# Altium PCB S6_Fuel_counter_h.PcbDoc
Units mm, origin at the board's own origin, x right, y up, seen from the top; angles counter-clockwise.
Board outline 87.83 x 73.75 mm, 2 copper layers (Top Layer, Bottom Layer); 82 components, 47 nets, 252 pads, 148 vias.
Unrouted connection lines stored in the file: 3.
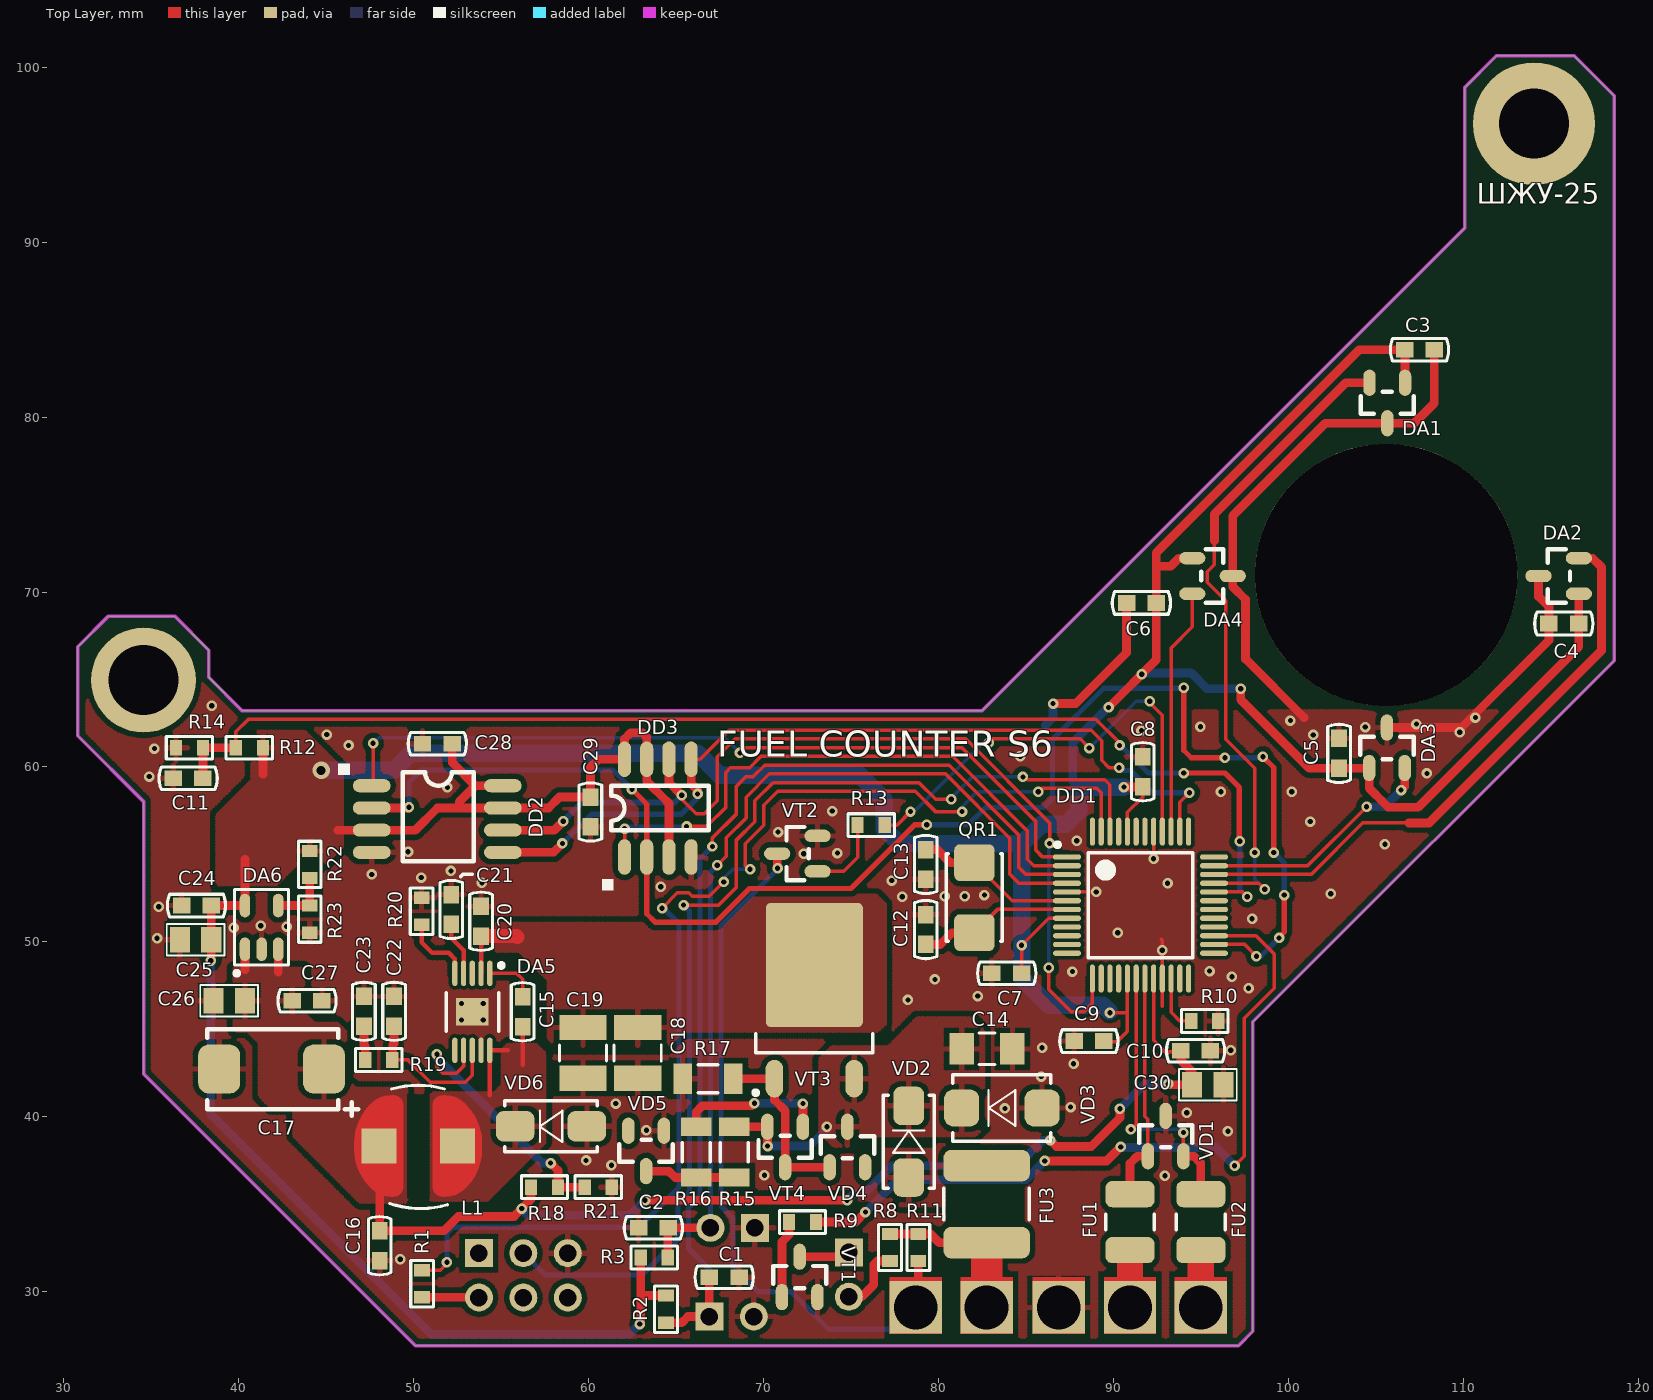
[diagram p0: Top Layer view]
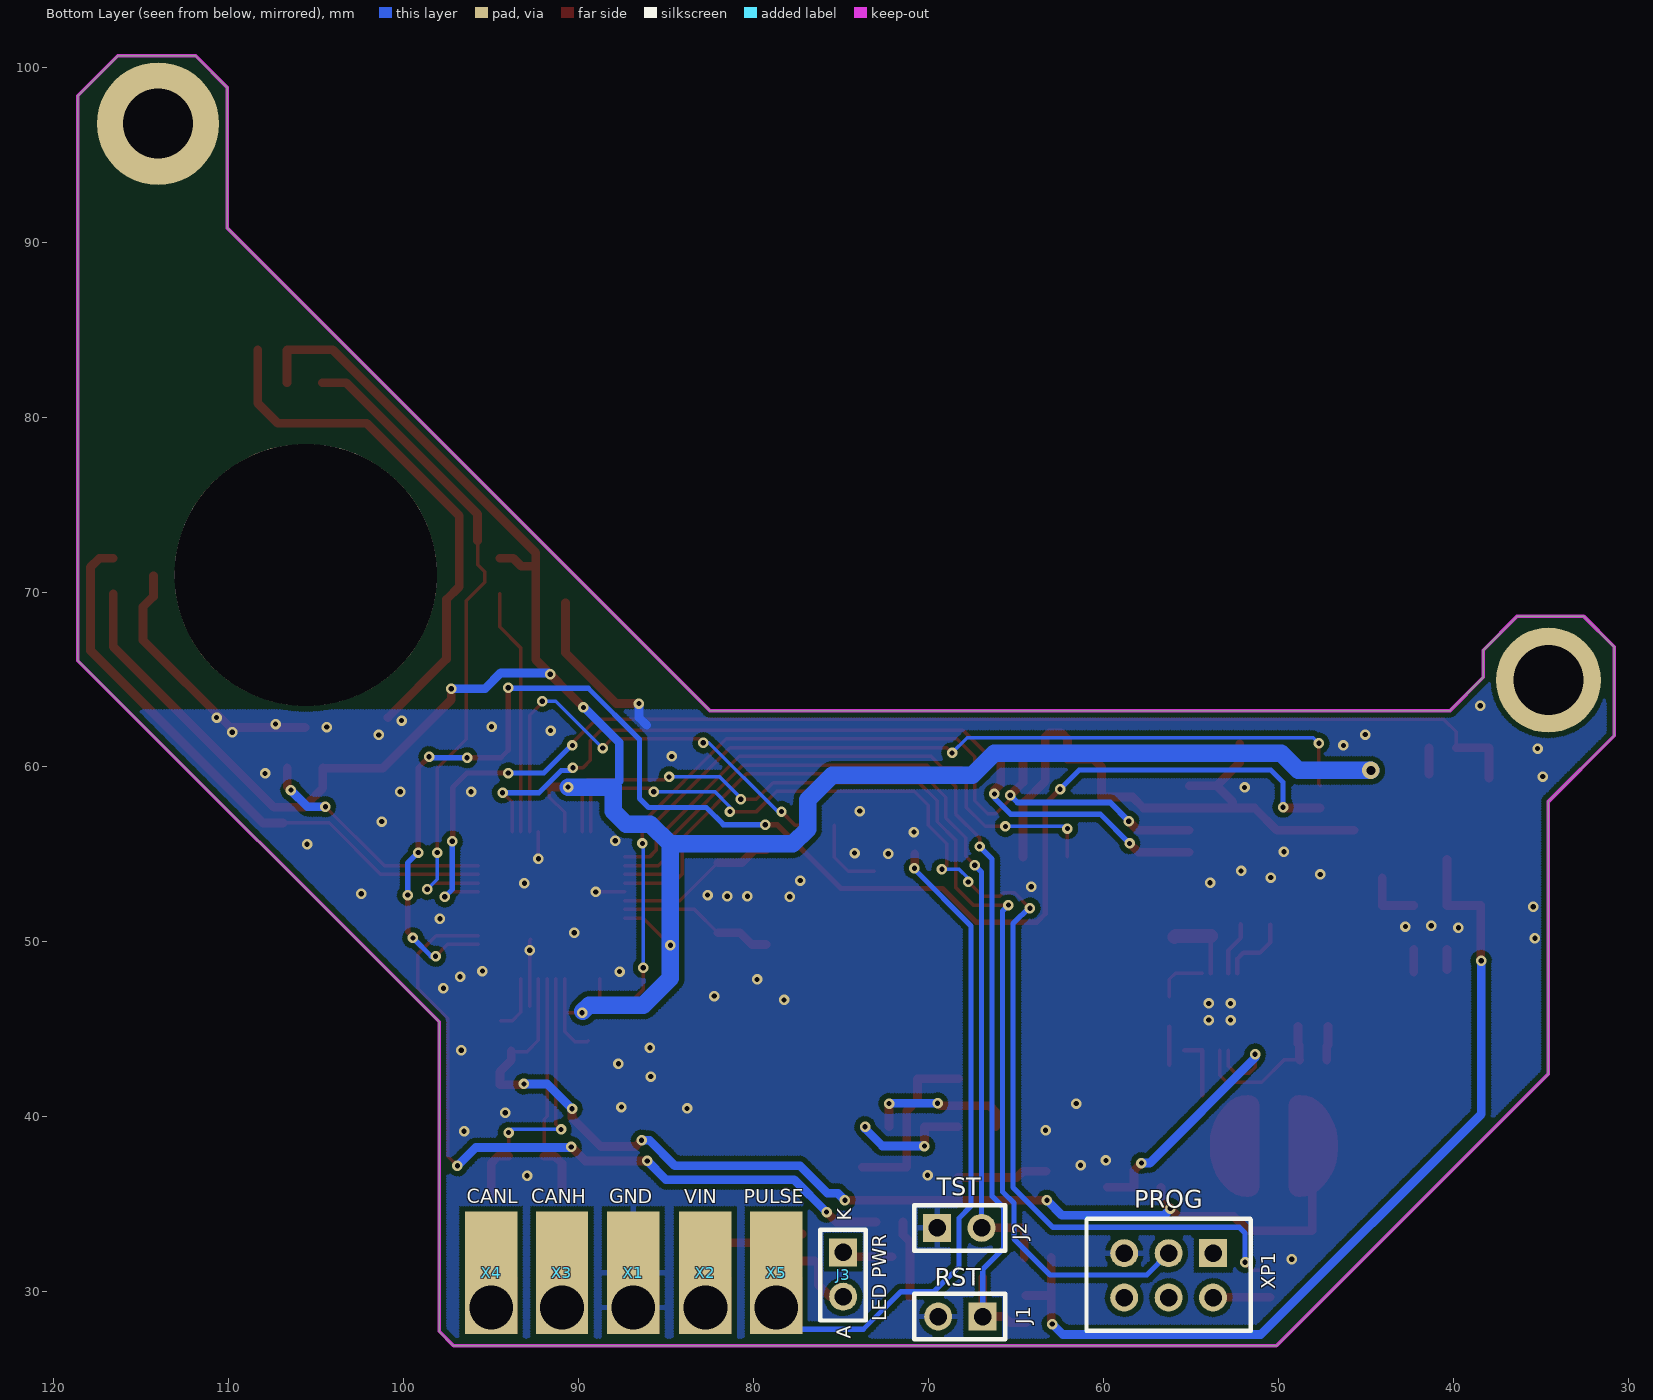
[diagram p1: Bottom Layer view, seen from below]

## Layer stack, top to bottom
Top Solder: solder mask 0.0102, Solder Resist, Dk 3.5
Top Layer: signal copper 0.0356
Dielectric 1: dielectric 0.32, FR-4, Dk 4.8
Bottom Layer: signal copper 0.0356
Bottom Solder: solder mask 0.0102, Solder Resist, Dk 3.5

## Board outline
34.55,42.45 34.55,58.025 30.8,61.775 30.8,66.875 32.55,68.625 36.325,68.625 38.275,66.675 38.275,65.125 40.175,63.225 82.5,63.225 110.075,90.8 110.075,98.825 111.899,100.649 116.351,100.649 118.625,98.375 118.625,66.075 97.975,45.425 97.975,27.725 97.15,26.9 50.1,26.9

## Design rules (kind name [scope] priority, off if disabled: settings)
Clearance Clearance_1 [InComponent('DD1') OR InComponent('DA5')] p1: gap=0.2 ignorepadtopadclearanceinfootprint=FALSE except(0: Arc-Hole Track-Hole SMDPad-Hole THPad-Hole Via-Hole Fill-Hole Poly-Hole Region-Hole Text-Hole)
Clearance [All] p2: gap=0.3 ignorepadtopadclearanceinfootprint=FALSE except(0: Arc-Hole Track-Hole SMDPad-Hole THPad-Hole Via-Hole Fill-Hole Poly-Hole Region-Hole Text-Hole)
ComponentClearance [All] p1: gap=0.2 collisioncheckmode=3 verticalgap=2540 showdistances=FALSE
PolygonConnect PolygonConnect_1 [IsVia OR InComponent('VT3') AND InNet('VIN_F') OR InComponent('L1') OR InComponent('DA5') AND InNet('GND')] p1: connectstyle=Direct reliefconductorwidth=0.254 reliefentries=4 polygonreliefangle="90 Angle" airgapwidth=0.254
PolygonConnect [All] p2: connectstyle=Relief reliefconductorwidth=0.3 reliefentries=4 polygonreliefangle="90 Angle" airgapwidth=0.3
RoutingVias [All] p1: holewidth=0.4 width=0.8 viastyle="Through Hole" minholewidth=0.3 minwidth=0.6 maxholewidth=0.5 maxwidth=1
SolderMaskExpansion [All] p1: expansion=0.102
Width [All] p1: maxlimit=3 minlimit=0.2 preferedwidth=0.5
29 further rules are at their usual default settings.

## Classes and differential pairs
component class Power: C14 C15 C16 C17 C18 C19 C20 C21 C22 C23 C24 C25 C26 C27 DA5 DA6 FU3 L1 R15 R16 R17 R18 R19 R20 R21 R22 R23 VD2 VD3 VD4 VD5 VD6 VT3 VT4
component class MCU: C7 C8 C9 C11 C12 C13 C28 C29 C30 DD1 DD2 DD3 J3 QR1 R8 R9 R10 R11 R12 R13 R14 VT1 VT2
component class Hall_sensor: C3 C4 C5 C6 DA1 DA2 DA3 DA4
component class Connections: C1 C2 FU1 FU2 J1 J2 R1 R2 R3 VD1 X1 X2 X3 X4 X5 XP1

## Components (designator, comment, footprint, x,y, rotation, side; value= is the part's Value field where it differs from the comment)
C1 "200pF" CC0603 67.75,30.825 r180 top
C2 "200pF" CC0603 63.7,33.65 r0 top
C3 "0.1uF" CC0603 107.5,83.85 r180 top
C4 "0.1uF" CC0603 115.75,68.2 r0 top
C5 "0.1uF" CC0603 102.9,60.775 r270 top
C6 "0.1uF" CC0603 91.6,69.375 r0 top
C7 "0.1uF" CC0603 83.9,48.2 r0 top
C8 "0.1uF" CC0603 91.675,59.725 r270 top
C9 "0.1uF" CC0603 88.6,44.325 r180 top
C10 "0.1uF" CC0603 94.7,43.775 r180 top
C11 "0.1uF" CC0603 37.1,59.35 r0 top
C12 "22pF" CC0603 79.273,50.7 r270 top
C13 "22pF" CC0603 79.275,54.425 r90 top
C14 "0.1uF" CC1206 82.775,43.875 r180 top
C15 "0.1 uF" CC0603 56.225,46 r90 top
C16 "0.1 uF" CC0603 48.05,32.625 r270 top
C17 "470uFx6.3V" TAJ-D-1M 41.875,42.725 r180 top
C18 "10uFx50V" CC1210 62.8,43.65 r90 top
C19 "10uFx50V" CC1210 59.675,43.65 r90 top
C20 "0.1 uF" CC0603 53.85,51.175 r90 top
C21 "10 nF" CC0603 52.15,51.85 r90 top
C22 "330pF" CC0603 48.875,46.025 r90 top
C23 "560pF" CC0603 47.15,46.025 r90 top
C24 "0.1uF" CC0603 37.575,52.075 r180 top
C25 "10uFx6.3V" CC0805 37.525,50.125 r0 top
C26 "4.7uF 6.3V" CC0805 39.45,46.625 r0 top
C27 "0.1uF" CC0603 43.9,46.625 r0 top
C28 "n.p" CC0603 51.35,61.325 r180 top
C29 "0.1uF" CC0603 60.1,57.425 r270 top
C30 "10uFx16V" CC0805 95.4,41.825 r180 top
DA1 "DRV5033AJQDBZR" SOT-23(123) 106.675,81.975 r90 top
DA2 "DRV5033AJQDBZR" SOT-23(123) 116.625,69.9 r0 top
DA3 "DRV5033AJQDBZR" SOT-23(123) 104.625,59.925 r270 top
DA4 "DRV5033AJQDBZR" SOT-23(123) 94.5,71.932 r180 top
DA5 "TPS54260DGQ" S-PDSO-G10 54.35,48.2 r270 top
DA6 "AP2210K-ADJTRG1" SOT23-5 41.3,50.825 r90 top
DD1 "LPC11C24FBD48" LQFP-48 91.55,52.1 r0 top
DD2 "n.p" EIAJ_SO8 47.6,58.925 r0 top
DD3 "FM25CL64-G" SO-8 62.05,54.85 r0 top
FU1 "MICROSMD010F-2" RC1210 90.95,33.975 r270 top
FU2 "MICROSMD010F-2" RC1210 95,33.975 r270 top
FU3 "MF-SMDF050" MF-SMDF 82.75,35 r90 top
J1 "PLS-02" PLS-02 66.9,28.575 r0 bottom
J2 "PLS-02" PLS-02 69.5,33.65 r180 bottom
J3 "PLS-02" PLS-02 74.875,32.25 r270 bottom
L1 "330uH" SDR0603 52.5,38.325 r180 top
QR1 "NX5032GA-12.000MHz LN-CD-1" AC5032_2 82.05,52.525 r270 top
R1 "100E" RC0603 50.475,30.45 r90 top
R2 "10k" RC0603 64.425,29 r90 top
R3 "10k" RC0603 63.75,31.95 r180 top
R8 "3k" RC0603 77.225,32.525 r90 top
R9 "1k" RC0603 72.225,33.975 r180 top
R10 "0E" RC0603 95.225,45.475 r180 top
R11 "10k" RC0603 78.85,32.525 r90 top
R12 "10k" RC0603 40.6,61.1 r0 top
R13 "1k" RC0603 76.15,56.675 r180 top
R14 "NCP18XH103J03RB" RC0603 37.175,61.1 r0 top
R15 "220k" RC1206 68.325,37.975 r90 top
R16 "220k" RC1206 66.15,37.975 r90 top
R17 "220k" RC1206 66.825,42.175 r180 top
R18 "68k1 1%" RC0603 57.475,35.975 r180 top
R19 "12k" RC0603 47.997,43.245 r0 top
R20 "240k" RC0603 50.45,51.75 r270 top
R21 "13k 1%" RC0603 60.55,35.975 r180 top
R22 "11k 1%" RC0603 44.05,54.425 r90 top
R23 "18k 1%" RC0603 44.05,51.3 r90 top
VD1 "PESD2CAN" SOT-23(123) 91.975,37.725 r270 top
VD2 "GS1M" SMA 78.3,38.575 r90 top
VD3 "SMBJ150A" SMB 83.625,40.5 r0 top
VD4 "BZX84C15" SOT-23(123) 73.775,37.1 r270 top
VD5 "BZX84C39" SOT-23(123) 64.3,39.213 r90 top
VD6 "SK34SMA" SMA 57.85,39.45 r180 top
VT1 "BC817-40" SOT-23(123) 71.05,29.675 r270 top
VT2 "BC817-40" SOT-23(123) 73.1,54.025 r0 top
VT3 "FQD5P20TM" D-PAK(TO-252AA) 72.9,46.675 r90 top
VT4 "BC807-40" SOT-23(123) 72.25,39.437 r90 top
X1 "PIN_7x3mm_SMD" PIN_7x3mm_SMD 86.875,31.075 r90 bottom
X2 "PIN_7x3mm_SMD" PIN_7x3mm_SMD 82.75,31.075 r90 bottom
X3 "PIN_7x3mm_SMD" PIN_7x3mm_SMD 90.95,31.075 r90 bottom
X4 "PIN_7x3mm_SMD" PIN_7x3mm_SMD 95,31.075 r90 bottom
X5 "PIN_7x3mm_SMD" PIN_7x3mm_SMD 78.7,31.075 r90 bottom
XP1 "PLD-06" PIN6 53.725,32.2 r0 bottom

## Footprints (in the part's own frame and the unit in brackets; to place one, negate y for a bottom-side part, rotate by r counter-clockwise, add the part's x,y. Pads: shape width x height; smd on the part's side, far side on the other; paste and mask are expansions set on the pad)
AC5032_2 [mm]
  rrect30% 2.1x2.3 smd mask+0.05: 1(-2,0) 2(2,0)
  silkscreen extent -2.5,-1.6 2.5,1.6
CC0603 [mm]
  rect 1x0.9 smd paste-25.4 mask+0.05: 1(-0.85,0) 2(0.85,0)
  silkscreen extent -1.66,-0.65 1.66,0.65
CC0805 [mm]
  rect 1.15x1.45 smd paste-25.4 mask+0.05: 1(-0.9,0) 2(0.9,0)
  silkscreen extent -1.65,-0.9 1.65,0.9
CC1206 [mm]
  rect 1.4x1.8 smd paste-25.4 mask+0.05: 1(-1.45,0) 2(1.45,0)
  silkscreen extent -0.45,-0.9 0.45,0.9
CC1210 [mm]
  rect 1.45x2.7 smd paste-10 mask+0.05: 1(-1.45,0) 2(1.45,0)
  silkscreen extent -0.45,-1.35 0.45,1.35
D-PAK(TO-252AA) [mm]
  oval 2.15x1 smd mask+0.05: 1(-4.5,2.28) 3(-4.5,-2.28)
  rrect10% 7.1x5.55 smd mask+0.05: 2(2,0)
  silkscreen extent -5.42,-3.35 -1.92,3.47
EIAJ_SO8 [mil]
  oval 85x29.53 smd mask+1.97: 1(0,0) 2(0,-50) 3(0,-100) 4(0,-150) 5(295,-150) 6(295,-100) 7(295,-50) 8(295,0)
  silkscreen extent -75,-170 230,50
LQFP-48 [mm]
  oval 1.6x0.3 smd mask+0.05: 1(-4.2,2.75) 2(-4.2,2.25) 3(-4.2,1.75) 4(-4.2,1.25) 5(-4.2,0.75) 6(-4.2,0.25) 7(-4.2,-0.25) 8(-4.2,-0.75) 9(-4.2,-1.25) 10(-4.2,-1.75) 11(-4.2,-2.25) 12(-4.2,-2.75) 25(4.2,-2.75) 26(4.2,-2.25) 27(4.2,-1.75) 28(4.2,-1.25) 29(4.2,-0.75) 30(4.2,-0.25) 31(4.2,0.25) 32(4.2,0.75) 33(4.2,1.25) 34(4.2,1.75) 35(4.2,2.25) 36(4.2,2.75)
  oval 0.3x1.6 smd mask+0.05: 13(-2.75,-4.2) 14(-2.25,-4.2) 15(-1.75,-4.2) 16(-1.25,-4.2) 17(-0.75,-4.2) 18(-0.25,-4.2) 19(0.25,-4.2) 20(0.75,-4.2) 21(1.25,-4.2) 22(1.75,-4.2) 23(2.25,-4.2) 24(2.75,-4.2) 37(2.75,4.2) 38(2.25,4.2) 39(1.75,4.2) 40(1.25,4.2) 41(0.75,4.2) 42(0.25,4.2) 43(-0.25,4.2) 44(-0.75,4.2) 45(-1.25,4.2) 46(-1.75,4.2) 47(-2.25,4.2) 48(-2.75,4.2)
  silkscreen extent -4.87,-3 3,3.57
MF-SMDF [mm]
  rrect50% 1.8x4.95 smd mask+0.05: 1(-2.2,0) 2(2.2,0)
  silkscreen extent -0.9,-2.45 0.9,2.45
PIN6 [mm]
  rect 1.6x1.6 hole 1 mask+0.05: 1(0,0)
  round 1.6 hole 1 mask+0.05: 2(0,2.54) 3(2.54,0) 4(2.54,2.54) 5(5.08,0) 6(5.08,2.54)
  silkscreen extent -2.16,-1.96 7.24,4.44
PIN_7x3mm_SMD [mm]
  rect 7x3 smd mask+0.05: 1(0,0)
PLS-02 [mm]
  rect 1.6x1.6 hole 1 mask+0.05: 1(0,0)
  round 1.6 hole 1 mask+0.05: 2(2.54,0)
  silkscreen extent -1.3,-1.3 3.9,1.3
RC0603 [mm]
  rect 0.7x0.9 smd paste-25.4 mask+0.05: 1(-0.775,0) 2(0.774,0)
  silkscreen extent -1.32,-0.65 1.33,0.65
RC1206 [mm]
  rect 1.05x1.75 smd paste-25.4 mask+0.05: 1(-1.45,0) 2(1.45,0)
  silkscreen extent -0.55,-0.8 0.55,0.8
RC1210 [mm]
  rrect50% 1.5x2.8 smd mask+0.05: 1(-1.6,0) 2(1.6,0)
  silkscreen extent -0.45,-1.4 0.45,1.4
S-PDSO-G10 [mm]
  oval 1.45x0.3 smd mask+0.05: 1(0,0) 2(0,-0.5) 3(0,-1) 4(0,-1.5) 5(0,-2) 6(4.4,-2) 7(4.4,-1.5) 8(4.4,-1) 9(4.4,-0.5) 10(4.4,0)
  rect 1.55x1.85 smd mask+0.05: 11(2.2,-1)
  silkscreen extent -0.57,-2.5 3.3,0.77
SDR0603 [mm]
  rect 2x2 smd paste-25.4 mask+0.05: 1(0,0) 2(4.5,0)
  Top Layer region: 3.65,2.9 3.48,2.873 3.327,2.795 3.205,2.673 3.127,2.52 3.1,2.35 3.1,-2.35 3.127,-2.52 3.205,-2.673 3.327,-2.795 3.48,-2.873 3.65,-2.9 3.824,-2.9 4.119,-2.871 4.402,-2.785 4.663,-2.645 4.892,-2.458 5.002,-2.348 5.275,-2.035 5.502,-1.687 5.68,-1.312 5.681,-1.31 5.802,-0.934 5.875,-0.545 5.9,-0.15 5.9,0.183 5.877,0.556 5.807,0.924 5.693,1.28 5.689,1.288 5.505,1.679 5.268,2.04 4.984,2.366 4.908,2.442 4.671,2.637 4.401,2.781 4.107,2.87 3.802,2.9
  Top Layer region: 0.85,-2.9 1.02,-2.873 1.173,-2.795 1.295,-2.673 1.373,-2.52 1.4,-2.35 1.4,2.35 1.373,2.52 1.295,2.673 1.173,2.795 1.02,2.873 0.85,2.9 0.676,2.9 0.381,2.871 0.098,2.785 -0.163,2.645 -0.392,2.458 -0.502,2.348 -0.775,2.035 -1.002,1.687 -1.18,1.312 -1.181,1.31 -1.302,0.934 -1.375,0.545 -1.4,0.15 -1.4,-0.183 -1.377,-0.556 -1.307,-0.924 -1.193,-1.28 -1.189,-1.288 -1.005,-1.679 -0.768,-2.04 -0.484,-2.366 -0.408,-2.442 -0.171,-2.637 0.099,-2.781 0.393,-2.87 0.698,-2.9
  silkscreen extent 0.58,-3.47 3.88,3.57
SMA [mm]
  rrect50% 2.2x1.75 smd mask+0.05: 1(-2.05,0) 2(2.05,0)
  silkscreen extent -2.65,-1.45 2.65,1.45
SMB [mm]
  rrect50% 2x2.1 smd mask+0.05: 1(2.3,0) 2(-2.3,0)
  silkscreen extent -2.8,-1.9 2.8,1.9
SO-8 [mil]
  oval 29.53x80 smd mask+1.97: 1(0,0) 2(50,0) 3(100,0) 4(150,0) 5(150,220) 6(100,220) 7(50,220) 8(0,220)
  silkscreen extent -50,-75 190,160
SOT23-5 [mm]
  oval 1.35x0.6 smd mask+0.05: 1(-1.25,0.95) 2(-1.25,0) 3(-1.25,-0.95) 4(1.25,-0.95) 5(1.25,0.95)
  silkscreen extent -2.74,-1.55 2.16,1.55
SOT-23(123) [mil]
  oval 59.06x28.07 smd mask+1.97: 1(-0.5,0) 2(-0.5,80) 3(-91.5,40)
  silkscreen extent -70,-20 -21,100
TAJ-D-1M [mm]
  rrect50% 2.4x2.8 smd mask+0.05: 1(-2.997,0) 2(2.997,0)
  silkscreen extent -4.95,-2.29 3.68,2.67

## Part data
C1 C2 C3 C4 C5 C6 C7 C8 C9 C10 C11 C12 C13 C15 C16 C20 C21 C22 C23 C24 C27 C28 C29: library part CC0603, "CC0603"
C14: library part CC1206, "CC1206"
C17: library part TAJ-D, "TAJ-D"
C18 C19: library part CC1210, "CC1210"
C25 C26 C30: library part CC0805, "CC0805"
DA1 DA2 DA3 DA4: library part DRV5033, "Hall sensor"
DA6: library part MCP1824T-ADJE/OT, "300 mA, Low Voltage, Low Quiescent Current LDO Regulator, 5-Pin SOT-223, Extended Temperature, Tape and Reel"
DD2: library part S25FL016A0LMFI01, "S25FL016A0LMFI01"
FU1 FU2: library part MICROSMD, "MICROSMD"
FU3: library part MF-SMDF, "MF-SMDF"
L1: library part SDR0603, "SDR0603"
QR1: library part AC5032_2, "AC5032/2"
R1 R2 R3 R8 R9 R10 R11 R12 R13 R14 R18 R19 R20 R21 R22 R23: library part RC0603, "RC0603"
R15 R16 R17: library part RC1206, "RC1206"
VD1: "TVS for CAN"
VD3: library part SMBJ, "SMBJ"
VD4 VD5: library part BZX84, "Zener Voltage Regulator Diode"
VD6: "Schottky Rectifier"
VT1 VT2: library part BC846BLT1, "NPN 500ma transistor"
VT3: library part IRFR9220, "HEXFET Power MOSFET"
VT4: library part BC857B, "BC857B"
XP1: "PLD06"

## Free pads (board coordinates)
  round 6 hole 4 mask+0.05: 0(34.55,64.964)
  round 15 hole 15 unplated mask+0.05: 0(105.6,70.975)
  round 7 hole 4 mask+0.05: 0(114.046,96.774)
  rect 3x3 hole 2.5 mask+0.05: 1(78.7,29.1) 1(82.75,29.1) 1(86.875,29.1) 1(90.95,29.1) 1(95,29.1)

## Via types
v1: diameter 0.6, hole 0.3, Top Layer to Bottom Layer, 147 vias
v2: diameter 1, hole 0.5, Top Layer to Bottom Layer, 1 vias

## Nets (pads, with @x,y where several pads share a name; then routed paths per layer and width w, separated by ;. In a path a pad name is that pad's centre, name@x,y a point inside that pad or via, vN(x,y) a via of type N, cw(c..) or ccw(c..) an arc to the next point about the centre after c; other vN are vias at no path point)
+3V3: C3.2 C4.2 C5.2 C6.2 C7.2 C8.2 C9.1 C24.1 C25.2 C28.1 C29.1 DA1.1 DA2.1 DA3.1 DA4.1 DA6.5 DD1.8 DD1.17 DD1.44 DD2.3 DD2.7 DD2.8 DD3.3 DD3.7 DD3.8 R2.2 R3.2 R12.2 R22.2 | length 242.9
  Top Layer w0.2: C7.2 v1(84.75,49.8) 86.3,51.35 DD1.8 ; C9.1@89.45,44.35 89.5,44.3 90.225,44.3 90.8,44.875 90.8,45.95 ; v1(89.8,45.95) 90.8,45.95 ; DD1.17 90.8,45.95 ; DD1.44 90.8,57.4 91.675,58.275 C8.2
  Top Layer w0.5: v1(38.4,48.925) 38.425,48.95 C25.2 C24.1 DA6.5 40.35,54.725 ; 41.374,59.576 R12.2 ; 45.65,56.385 DD2.3 50.085,56.385 51.355,57.655 52.6,57.655 ; C28.1 52.2,60.25 53.525,58.925 ; DD2.8 53.525,58.925 ; v1(62.925,28.15) 62.976,28.201 62.976,29.825 ; R3.2 62.976,29.825 ; R2.2 63.026,29.774 62.976,29.825 ; DD3.3 64.59,57.908 64.475,58.023 64.475,58.025 63.32,59.18 DD3.7 63.32,61.705 63.075,61.95 62.4,61.95 62.05,61.6 DD3.8 60.563,60.438 60.1,59.975 C29.1 58.325,58.275 57.705,57.655 DD2.7 52.6,57.655 ; v1(89.725,63.4) 92.45,66.125 C6.2 92.45,72.25 104.05,83.85 C3.2 106.675,83.825 DA1.1 ; v1(90.6,58.85) 91.65,58.85 C8.2 ; 92.525,71.475 93.275,71.475 93.732,71.932 DA4.1 ; v1(97.275,64.475) 97.275,63.85 101.2,59.925 C5.2 104.612,59.925 DA3.1 104.625,58.775 104.825,58.575 104.827,58.575 105.325,58.077 105.325,58.075 105.7,57.7 107.425,57.7 116.6,66.875 C4.2 DA2.1@116.6,69.888 ; 52.6,57.655 52.6,58 53.525,58.925
  Bottom Layer w0.5: v1(38.4,48.925) 38.4,40.144 50.994,27.55 62.325,27.55 v1(62.925,28.15) ; 88.019,58.85 87.675,59.194 87.675,61.4 89.675,63.4 v1(89.725,63.4) ; v1(91.625,65.3) 91.7,65.375 94.45,65.375 95.35,64.475 v1(97.275,64.475)
  Bottom Layer w1: v2(44.7,59.8) 48.85,59.8 49.825,60.775 66.25,60.775 67.5,59.525 75.5,59.525 76.9,58.125 76.9,56.45 77.75,55.6 84.769,55.6 ; v1@89.75,46.025 89.4,46.375 86.3,46.375 84.75,47.925 84.75,55.581 84.769,55.6 ; v1(90.6,58.85) 88.019,58.85 88.019,57.469 87.275,56.725 85.894,56.725 84.769,55.6
+5V: C10.2 C16.1 C17.1 C26.2 C27.1 C30.2 DA6.1 DA6.3 DD1.20 L1.2 R18.2 | length 65.4
  Top Layer w0.2: DD1.20 92.3,44.375 92.95,43.725 93.8,43.725 C10.2
  Top Layer w0.5: 40.35,48.4 DA6.1 ; 42.25,48.275 DA6.3 ; 48.05,36.525 C16.1 51.725,33.475 52.55,34.3 55.725,34.3 56.701,35.276 R18.2 ; v1(63.225,35.225) v1(74.775,35.225) ; v1(86.4,38.65) 86.75,38.3 88.725,38.3 90.375,39.95 v1(90.375,40.45) ; v1(93.125,41.875) 93.175,41.825 C30.2 94.5,42.575 93.85,43.225 C10.2
  Bottom Layer w0.5: v1(56.175,34.75) 56.175,34.725 56.525,34.375 62.375,34.375 v1(63.225,35.225) ; v1(74.775,35.225) 75.175,35.625 75.769,35.625 77.344,37.2 84.5,37.2 85.95,38.65 v1(86.4,38.65) ; v1@90.4,40.425 v1(90.375,40.45) 91.8,41.875 v1(93.125,41.875)
CANH: DD1.19 FU1.1 VD1.1 | length 13.2
  Top Layer w0.2: DD1.19 91.8,40.025 91.975,39.85 VD1.1
  Top Layer w0.5: FU1.1 90.95,37.325 91.363,37.738 VD1.1
CANHF: FU1.2 pad.1@90.95,29.1 X3.1 | length 3.3
  Top Layer w1.5: pad.1@90.95,29.1 FU1.2
CANL: DD1.18 FU2.1 VD1.2 | length 16.1
  Top Layer w0.2: v1(91,39.275) 91.3,39.575 DD1.18 ; VD1.2 v1(94.007,39.093)
  Top Layer w0.5: VD1.2 94.612,37.738 95,37.35 FU2.1
  Bottom Layer w0.2: v1(91,39.275) 93.825,39.275 v1(94.007,39.093)
CANLF: FU2.2 pad.1@95,29.1 X4.1 | length 3.3
  Top Layer w1.5: pad.1@95,29.1 FU2.2
GND: C1.1 C2.1 C3.1 C4.1 C5.1 C6.1 C7.1 C8.1 C9.2 C10.1 C11.1 C12.1 C13.1 C14.1 C16.2 C17.2 C18.1 C19.1 C20.2 C21.2 C22.2 C23.2 C24.2 C25.1 C26.1 C27.2 C28.2 C29.2 C30.1 DA1.3 DA2.3 DA3.3 DA4.3 DA5.9 DA5.11 DA6.2 DD1.5 DD1.21 DD1.41 DD2.4 DD3.4 J1.2 J2.1 pad.1@86.875,29.1 R10.1 R14.1 R17.2 R20.1 R21.1 R23.1 VD1.3 VD3.1 VD5.1 VD6.1 VT1.2 VT2.2 X1.1 XP1.5 | length 62.5
  Top Layer w0.2: DD1.5 v1(89.025,52.85) ; v1(92.3,54.75) DD1.41 ; 92.75,50.15 92.8,50.1 DD1.21 92.8,46.325
  Top Layer w0.5: v1(86.55,63.625) 87.85,63.625 90.75,66.525 C6.1 ; 100.9,62.825 97.55,66.175 97.55,69.575 96.824,70.301 DA4.3 96.824,74.361 102.114,79.651 DA1.3 107.201,79.651 108.35,80.8 C3.1 ; DA3.3 109.899,62.249 114.9,67.25 C4.1 114.9,69.15 114.301,69.749 DA2.3
  Bottom Layer w0.5: 86.1,62.375 86.55,62.825 v1(86.55,63.625)
  other v1: 49.225,31.85 92.95,36.625 70.05,36.65 61.3,37.225 59.85,37.5 96.55,39.175 63.3,39.225 94.2,40.233 83.8,40.475 87.55,40.55 61.55,40.75 85.875,42.3 87.725,43.025 96.713,43.8 85.925,43.95 52.725,45.525 53.975,45.525 52.725,46.475 53.975,46.475 78.25,46.675 82.25,46.9 97.725,47.35 79.8,47.85 96.775,48 87.656,48.3 95.5,48.325 92.8,49.525 35.325,50.2 90.25,50.525 39.7,50.8 42.725,50.875 41.25,50.925 97.925,51.325 35.425,52 77.925,52.575 80.35,52.6 81.5,52.6 82.625,52.675 102.425,52.75 64.125,53.15 93.1,53.35 53.9,53.375 77.325,53.5 50.425,53.675 47.6,53.85 52.125,54.05 72.3,55.041 74.225,55.075 49.675,55.15 105.525,55.575 87.9,55.775 70.825,56.275 101.25,56.875 73.925,57.475 96.15,58.575 100.2,58.575 51.925,58.825 34.875,59.45 107.925,59.625 84.675,60.6 35.175,61.05 46.275,61.225 101.425,61.825 45.025,61.85 109.8,61.975 91.6,62.075 104.4,62.275 94.975,62.3 107.325,62.45 100.125,62.65 110.7,62.825 38.45,63.5
ISP_START: C2.2 DD1.4 J2.2 R3.1 | length 52.3
  Top Layer w0.2: v1(67.35,54.375) 67.875,54.9 67.875,55.957 69,57.082 69,58.265 70.335,59.6 80.4,59.6 84.075,55.925 84.075,53.875 84.6,53.35 DD1.4
  Top Layer w0.5: R3.1 64.525,33.625 C2.2 J2.2
  Bottom Layer w0.3: J2.2 66.96,53.985 v1(67.35,54.375)
LED: DD1.27 R9.1 | length 43.1
  Top Layer w0.2: DD1.27 98.15,50.35 99.196,49.304 99.196,47.354 97.475,45.632 97.475,37.75 v1(96.925,37.2)
  Top Layer w0.5: R9.1 75.25,33.975 v1(75.825,34.55) ; v1(86.075,37.475) 89.625,37.475 v1(90.425,38.275)
  Bottom Layer w0.5: v1(75.825,34.55) 77.675,36.4 85,36.4 v1(86.075,37.475) ; v1(90.425,38.275) 90.457,38.243 95.882,38.243 v1(96.925,37.2)
MISO: DD1.26 DD2.2 DD3.2 | length 86.8
  Top Layer w0.2: DD1.26 97.5,49.85 v1(98.175,49.175)
  Top Layer w0.3: v1(62.475,58.725) 63.32,57.88 DD3.2 63.32,51.605 63.8,51.125 67.275,51.125 69.2,53.05 75,53.05 78.65,56.7 v1(79.325,56.7) ; v1(94.025,64.525) 94.025,60.95 94.45,60.525 v1(96.375,60.525) ; v1(98.55,60.575) 99.175,59.95 v1(99.175,55.1) ; v1(99.475,50.225) 99.425,50.225 99.775,50.575 v1(99.775,52.675)
  Top Layer w0.5: DD2.2 49.68,57.655 v1(49.725,57.7)
  Bottom Layer w0.3: v1(49.725,57.7) 49.725,59.125 50.425,59.825 61.375,59.825 v1(62.475,58.725) ; v1(79.325,56.7) 81.725,56.7 82.7,57.675 86,57.675 86.525,58.2 86.525,61.575 89.45,64.5 94,64.5 v1(94.025,64.525) ; v1(96.375,60.525) 98.5,60.525 v1(98.55,60.575) ; v1(98.175,49.175) 98.425,49.175 v1(99.475,50.225) ; v1(99.175,55.1) 99.775,54.5 v1(99.775,52.675)
MOSI: DD1.38 DD2.5 DD3.5 | length 48.6
  Top Layer w0.2: DD3.5 66.363,60.438 68.025,62.1 88.725,62.1 89.325,61.5 89.325,60.375 89.75,59.95 v1(90.325,59.95) ; DD1.38 93.8,57.975 v1(94.35,58.525)
  Top Layer w0.5: DD2.5 57.99,55.115 v1(58.5,55.625) ; DD3.5 65.86,59.042 66.228,58.674 v1(66.228,58.453)
  Bottom Layer w0.3: v1(58.5,55.625) 60.175,57.3 65.311,57.3 66.228,58.218 v1(66.228,58.453) ; v1(90.325,59.95) 90.475,59.8 90.994,59.8 92.268,58.525 v1(94.35,58.525)
NetC14_2: C14.2 R15.2 VD2.2 VD3.2 VD4.3 VT3.3 VT4.2 | length 6.9
  Top Layer w0.5: R15.2 70.217,39.425 VT4.2 70.218,38.332 v1(70.225,38.325)
  Bottom Layer w0.5: v1(70.225,38.325) 72.625,38.325 73.625,39.325 v1(73.625,39.425)
NetC15_1: C15.1 DA5.10 L1.1 VD6.2 | length 5.8
  Top Layer w0.25: 54.35,41.225 DA5.10 55.375,43.8 ; 56.225,42.975 C15.1
NetC15_2: C15.2 DA5.1 | length 3
  Top Layer w0.2: DA5.1 55.875,48.2 56.225,47.85 C15.2
NetC21_1: C21.1 DA5.4 | length 3.1
  Top Layer w0.25: C21.1 52.15,50.225 52.85,49.525 DA5.4
NetC22_1: C22.1 DA5.8 R19.2 | length 8.7
  Top Layer w0.2: R19.2 49.673,43.245 50.943,41.975 52.95,41.975 53.35,42.375 DA5.8
  Top Layer w0.5: R19.2 48.8,43.274 48.8,44.1 48.875,44.175 C22.1
NetC23_1: C23.1 R19.1 | length 2
  Top Layer w0.5: C23.1 47.15,44.1 47.222,44.028 R19.1
NetDA5_5: DA5.5 R20.2 | length 4.1
  Top Layer w0.25: R20.2 50.45,49.975 51.05,49.375 52,49.375 52.35,49.025 DA5.5
NetDA5_7: DA5.7 R18.1 R21.2 | length 15.7
  Top Layer w0.2: v1(51.325,43.575) 51.325,42.825 51.65,42.5 52.45,42.5 52.85,42.9 DA5.7
  Top Layer w0.5: v1(57.825,37.35) 58.25,36.925 R18.1 R21.2
  Bottom Layer w0.5: v1(51.325,43.575) 51.325,43.375 57.35,37.35 v1(57.825,37.35)
NetDA6_4: DA6.4 R22.1 R23.2 | length 3.4
  Top Layer w0.5: DA6.4 R23.2 R22.1
NetDD1_22: DD1.22 R10.2 | length 3.3
  Top Layer w0.2: DD1.22 93.3,45.975 93.8,45.475 R10.2
NetFU3_2: FU3.2 VD2.1
NetJ3_1: J3.1 VT1.3 | length 2.9
  Top Layer w0.5: VT1.3 74.624,31.999 J3.1
NetJ3_2: J3.2 R8.1 | length 3.9
  Top Layer w0.5: J3.2 75.61,29.71 76.3,30.4 76.3,31.55 76.5,31.75 R8.1
NetR1_1: R1.1 XP1.2 | length 3.3
  Top Layer w0.5: R1.1 53.71,29.675 XP1.2
NetR9_2: R9.2 VT1.1 | length 4.5
  Top Layer w0.5: VT1.1 71.05,32.85 71.451,33.251 R9.2
NetR11_1: pad.1@78.7,29.1 R11.1 VT2.3 X5.1 | length 40.4
  Top Layer w0.5: VT2.3 70.776,54.224 v1(70.8,54.2) ; pad.1@78.7,29.1 78.85,29.25 R11.1
  Bottom Layer w0.3: v1(70.8,54.2) 70.8,54.15 67.56,50.91 67.56,34.89 68.25,34.2 68.25,31.425 69.675,30 71.575,30 73.725,27.85 77.45,27.85 pad.1@78.7,29.1
NetR13_2: R13.2 VT2.1 | length 4.5
  Top Layer w0.2: VT2.1 74.575,54.025 75.376,54.826 R13.2
NetR15_1: R15.1 R16.1 VD5.3 | length 5.2
  Top Layer w0.5: VD5.3 64.586,36.889 64.95,36.525 R16.1 R15.1
NetR16_2: R16.2 VT4.1 | length 8.5
  Top Layer w0.5: R16.2 66.15,40.275 66.5,40.625 69.325,40.625 v1(69.475,40.775) ; VT4.1 v1(72.25,40.75)
  Bottom Layer w0.5: v1(69.475,40.775) 72.225,40.775 v1(72.25,40.75)
NetR17_1: R17.1 VD4.1 VT3.1 VT4.3 | length 10.2
  Top Layer w0.5: R17.1 VT3.1 70.62,40.955 71.234,40.341 VT4.3 VD4.1
PULSE: DD1.40 R13.1 | length 26.3
  Top Layer w0.2: R13.1 77.625,56.675 v1(78.4,57.45) ; v1(82.875,61.375) 83.1,61.6 88.1,61.6 v1(88.625,61.075) ; v1(92.075,63.75) 92.075,63.675 92.8,62.95 DD1.40
  Bottom Layer w0.2: v1(78.4,57.45) 78.625,57.45 82.55,61.375 v1(82.875,61.375) ; v1(88.625,61.075) 91.3,63.75 v1(92.075,63.75)
RESET: C1.2 DD1.3 J1.1 R2.1 | length 59.9
  Top Layer w0.2: v1(67.075,55.45) 67.075,55.935 68.45,57.31 68.45,58.9 69,59.45 69.407,59.45 70.057,60.1 80.607,60.1 84.575,56.132 84.575,54.275 85,53.85 DD1.3
  Top Layer w0.5: R2.1 65.325,28.225 65.675,28.575 J1.1 C1.2
  Bottom Layer w0.3: J1.1 66.9,31.275 65.71,32.465 65.71,34.81 66.36,35.46 66.36,54.735 v1(67.075,55.45)
RXD: DD1.46 XP1.3 | length 63.1
  Top Layer w0.2: v1(65.425,52.1) 67.425,52.1 68.45,53.125 68.45,55.825 69.5,56.875 69.5,58.058 70.542,59.1 73.625,59.1 78.885,59.1 79.835,58.15 v1(80.725,58.15) ; v1(84.825,59.425) 84.95,59.425 85.1,59.275 89.5,59.275 89.8,58.975 DD1.46
  Bottom Layer w0.2: v1(80.725,58.15) 80.725,58.225 81.925,59.425 v1(84.825,59.425)
  Bottom Layer w0.3: XP1.3 57.515,30.95 63.05,30.95 65.11,33.01 65.11,35.059 65.76,35.709 65.76,51.765 v1(65.425,52.1)
SCK: DD1.13 DD2.6 DD3.6 | length 54.4
  Top Layer w0.2: v1(65.325,58.375) 65.325,58.154 66.154,57.325 66.6,57.325 67.35,58.075 67.35,60.575 68.375,61.6 81.55,61.6 86.35,56.8 v1(86.35,55.625) ; v1(86.3,48.525) 86.3,47.275 87.575,46 88.325,46 88.8,46.475 DD1.13
  Top Layer w0.5: DD2.6 58.035,56.385 v1(58.55,56.9) ; DD3.6 64.59,59.11 v1(65.325,58.375)
  Bottom Layer w0.2: v1(86.3,48.525) 86.3,55.575 v1(86.35,55.625)
  Bottom Layer w0.33: v1(58.55,56.9) 59.61,57.96 64.91,57.96 v1(65.325,58.375)
SENSOR1: DA1.2 DD1.33 | length 38
  Top Layer w0.2: DD1.33 98.3,53.35 v1(98.65,53) ; 95.775,72.925 95.775,71.55 95.375,71.15 95.375,70.55 96.425,69.5 96.425,61.575 98.075,59.925 v1(98.075,55.1)
  Top Layer w0.5: 95.775,72.925 95.775,74.444 103.294,81.962 DA1.2
  Bottom Layer w0.2: v1(98.075,55.1) 98.075,53.575 v1(98.65,53)
SENSOR2: DA2.2 DD1.34 | length 33.7
  Top Layer w0.2: DD1.34 101.307,53.85 104.257,56.8 106.9,56.8
  Top Layer w0.5: 106.9,56.8 108.05,56.8 117.912,66.662 117.912,71.413 117.393,71.932 DA2.2
SENSOR3: DA3.2 DD1.35 | length 13.8
  Top Layer w0.2: DD1.35 101.1,54.35 v1(104.475,57.725)
  Top Layer w0.5: v1(106.45,58.675) 106.657,58.882 DA3.2
  Bottom Layer w0.5: v1(104.475,57.725) 105.5,57.725 v1(106.45,58.675)
SENSOR4: DA4.2 DD1.39 | length 14.1
  Top Layer w0.2: DD1.39 93.3,66.8 94.513,68.013 DA4.2
SS0: DD1.2 DD3.1 | length 33.4
  Top Layer w0.2: DD3.1 v1(62.05,56.475) ; v1(65.6,56.6) 66.75,56.6 67.85,57.7 67.85,59.7 68.1,59.95 69.2,59.95 69.85,60.6 80.814,60.6 85.075,56.339 85.075,54.725 85.45,54.35 DD1.2
  Bottom Layer w0.2: v1@62.025,56.5 v1(62.05,56.475) 62.175,56.6 v1(65.6,56.6)
SS1: DD1.1 DD2.1 | length 46.3
  Top Layer w0.2: DD2.1 47.675,59 v1(47.675,61.35) ; v1(68.65,60.8) 68.95,61.1 81.343,61.1 85.575,56.868 85.575,55.225 85.95,54.85 DD1.1
  Bottom Layer w0.2: v1(47.675,61.35) 48,61.675 67.775,61.675 v1(68.65,60.8)
TEMPERATURE: C11.2 DD1.32 R12.1 R14.2 | length 72.4
  Top Layer w0.2: R12.1 39.825,62 40.55,62.725 89,62.725 90.35,61.375 v1(90.35,61.225) ; DD1.32 97.375,52.85 v1(97.65,52.575)
  Top Layer w0.3: v1(94.025,59.65) 96.375,59.65 97.2,58.825 97.2,55.775 v1(97.225,55.75)
  Top Layer w0.5: R14.2 R12.1 ; C11.2 R14.2
  Bottom Layer w0.3: v1(90.35,61.225) 90.417,61.225 91.992,59.65 v1(94.025,59.65) ; v1(97.225,55.75) 97.225,53 v1(97.65,52.575)
TXD: DD1.47 R1.2 | length 67.9
  Top Layer w0.2: R1.2 51.524,31.224 51.95,31.65 51.925,31.675 v1(51.9,31.675) ; v1(64.2,51.925) 65.075,52.8 65.715,52.8 65.915,52.6 66.9,52.6 v1(67.725,53.425) ; v1(69.225,54.15) 69.15,54.15 68.95,54.35 68.95,55.618 70,56.668 70,57.8 70.8,58.6 78.678,58.6 79.828,57.45 v1(81.35,57.45) ; v1(85.7,58.575) 85.9,58.775 89.05,58.775 89.3,58.525 DD1.47
  Bottom Layer w0.2: v1(67.725,53.425) 67.725,53.625 68.25,54.15 v1(69.225,54.15) ; v1(81.35,57.45) 81.35,57.725 82.2,58.575 v1(85.7,58.575)
  Bottom Layer w0.3: v1(51.9,31.675) 51.9,33.35 52.225,33.675 62.878,33.675 65.16,35.957 65.16,51.04 64.2,52 v1(64.2,51.925)
VIN: FU3.1 pad.1@82.75,29.1 R8.2 R11.2 X2.1 | length 9.4
  Top Layer w0.5: R8.2 R11.2 79.551,33.299 80.05,32.8 FU3.1
  Top Layer w1.8: pad.1@82.75,29.1 FU3.1
VIN_F: C18.2 C19.2 C20.1 DA5.2 VT3.2 | length 4.2
  Top Layer w0.25: DA5.2 C20.1
  Top Layer w0.8: C20.1 55.875,50.325 55.925,50.275
XTAL_IN: C13.2 DD1.6 QR1.1 | length 9.3
  Top Layer w0.2: QR1.1 84.225,52.35 DD1.6
  Top Layer w0.5: C13.2 79.925,55.275 80.675,54.525 QR1.1
XTAL_OUT: C12.2 DD1.7 QR1.2 | length 8.9
  Top Layer w0.2: QR1.2 83.375,51.85 DD1.7
  Top Layer w0.5: C12.2 80.1,49.85 80.775,50.525 QR1.2
pads on no net: DA5.3 DA5.6 DD1.9 DD1.10 DD1.11 DD1.12 DD1.14 DD1.15 DD1.16 DD1.23 DD1.24 DD1.25 DD1.28 DD1.29 DD1.30 DD1.31 DD1.36 DD1.37 DD1.42 DD1.43 DD1.45 DD1.48 VD4.2 VD5.2 XP1.1 XP1.4 XP1.6

## Polygon pours and split planes (outlines as drawn)
GND on Top Layer "GND_L01_P018" (hatched 90Degree grid 0.15 track 0.2, remove dead copper, pour order 18): 50.1,26.9 34.55,42.45 34.55,58.025 30.8,61.775 30.8,66.875 32.55,68.625 36.325,68.625 38.275,66.675 38.275,65.125 40.175,63.225 82.5,63.225 115.775,63.225 97.975,45.425 97.975,27.725 97.15,26.9
+3V3 on Top Layer "+3V3_L01_P016" (hatched 90Degree grid 0.15 track 0.2, remove dead copper, pour order 16): 38.75,53.25 38.75,57.225 38.75,57.25 39.775,58.275 40.75,59.25 40.75,60.875 40.75,61.725 41.075,62.05 41.85,62.05 43.75,62.05 44.65,61.15 45.9,59.9 45.9,58.3 45.9,55.425 45.225,54.75 44.95,54.475 43.95,54.475 43.35,54.475 42.85,53.975 42.125,53.25 41.2,53.25
NetFU3_2 on Top Layer "NETFU3_2_L01_P014" (hatched 90Degree grid 0.15 track 0.2, remove dead copper, pour order 14): 76.9,38.15 78.425,38.15 79.75,38.15 80,38.4 80.025,38.425 81.45,38.425 85.2,38.425 85.475,38.15 85.6,38.025 85.6,36.625 85.6,36.15 85.125,35.675 84.35,34.9 78.9,34.9 77.875,34.9 76.9,35.875
NetC14_2 on Top Layer "NETC14_2_L01_P012" (hatched 90Degree grid 0.15 track 0.2, remove dead copper, pour order 12): 73.2,40.7 73.2,41.7 73.2,43.3 73.525,43.625 73.9,44 74.85,44 77.125,44 78.25,45.125 78.775,45.65 80.675,45.65 81.85,45.65 82.2,45.3 82.575,44.925 82.575,43.675 82.575,39.4 82.15,38.975 82.075,38.9 79.575,38.9 75.675,38.9 75.3,38.525 75.075,38.3 74.05,38.3 74.025,38.3 73.2,39.125
+5V on Top Layer "+5V_L01_P010" (hatched 90Degree grid 0.15 track 0.2, remove dead copper, pour order 10): 39.725,48.5 43.725,48.5 43.725,46.875 43.725,45.925 44.1,45.55 44.375,45.275 44.375,44.725 44.375,41.35 43.8,40.775 43.55,40.525 42,40.525 41.825,40.525 41.4,40.95 41.175,41.175 41.175,42.15 41.175,44.225 40.675,44.725 40.5,44.9 39.95,44.9 39.825,44.9 39.725,45
+5V on Top Layer "+5V_L01_P008" (hatched 90Degree grid 0.15 track 0.2, remove dead copper, pour order 8): 49.6,41.625 46.675,41.625 46.3,42 46.125,42.175 46.125,43.025 46.125,44.85 45.7,45.275 45.625,45.35 44.025,45.35 43.725,45.35 43.475,45.1 43.125,44.75 43.125,43.65 43.125,38.9 46.4,35.625 46.925,35.1 49.6,35.1
NetC15_1 on Top Layer "NETC15_1_L01_P006" (hatched 90Degree grid 0.15 track 0.2, remove dead copper, pour order 6): 50.975,41.375 53.525,41.375 54.625,41.375 54.9,41.65 55.05,41.8 55.05,42.725 55.05,43.825 55.225,44 55.375,44.15 56.275,44.15 56.975,44.15 57.5,43.625 57.5,42.8 57.5,38.525 57.075,38.1 54.2,35.225 50.975,35.225
VIN_F on Top Layer "VIN_F_L01_P004" (hatched 90Degree grid 0.15 track 0.2, remove dead copper, pour order 4): 76.075,44.875 69.2,44.875 65.4,44.875 64.85,44.325 64.475,43.95 62.875,43.95 58.225,43.95 57.85,44.325 57.7,44.475 57.7,45.375 57.7,47.8 57,48.5 56.025,49.475 54.725,49.475 54.725,51.05 57.05,51.05 67.575,51.05 68.85,52.325 69.175,52.65 73.65,52.65 76.45,52.65 76.625,52.475 76.95,52.15 76.95,50.925 76.95,45.3 76.525,44.875
GND on Bottom Layer "GND_L02_P020" (hatched 90Degree grid 0.15 track 0.2, remove dead copper, pour order 20): 50.1,26.9 34.55,42.45 34.55,58.025 30.8,61.775 30.8,66.875 32.55,68.625 36.325,68.625 38.275,66.675 38.275,65.125 40.175,63.225 115.775,63.225 97.975,45.425 97.975,27.725 97.15,26.9

## Keep-outs
Keep-Out Layer:
  lines w0.2: 30.8,61.775 30.8,66.875 32.55,68.625 36.325,68.625 38.275,66.675 38.275,65.125 40.175,63.225 82.5,63.225 110.075,90.8 110.075,98.8 110.075,98.825 111.899,100.649 116.351,100.649 118.625,98.375 118.625,66.075 97.975,45.425 97.975,27.725 97.15,26.9 50.1,26.9 34.55,42.45 34.55,58.025 30.8,61.775

## Other copper
Top Layer:
  rectangle net NetR11_1: 77.2,27.575 80.2,30.85
  rectangle net VIN: 81.25,27.575 84.25,30.85
  rectangle net GND: 85.375,27.575 88.375,30.85
  rectangle net CANHF: 89.45,27.575 92.45,30.85
  rectangle net CANLF: 93.5,27.575 96.5,30.85
  pour cut-out: 49.5,41.375 51,41.375 51,35.25 49.5,35.25
  pour cut-out: 80.337,36.375 85.025,36.375 85.025,33.675 80.337,33.675
  pour cut-out: 93.563,34.85 96.438,34.85 96.438,33.05 93.563,33.05
  pour cut-out: 89.5,34.875 92.375,34.875 92.375,33.075 89.5,33.075

## Silkscreen, mask and mechanical layers (free items; w line width, h text height)
Top Overlay:
  lines w0.2: 52.675,53.725 52.825,53.875 53.35,53.875
  text "ШЖУ-25" at 110.775,91.8 h2
  text "FUEL COUNTER S6" at 67.35,60.575 h1.5
Bottom Overlay:
  text "TST" at 69.525,35.5 h1
  text "PULSE" at 80.55,35.05 h0.8
  text "VIN" at 83.95,35.05 h0.8
  text "GND" at 88.25,35.05 h0.8
  text "CANH" at 92.7,35.05 h0.8
  text "CANL" at 96.4,35.05 h0.8
  text "PROG" at 58.225,34.8 h1
  text "K" at 74.4,34.05 h0.8 r270
  text "RST" at 69.625,30.35 h1
  text "LED PWR" at 72.425,28.3 h0.8 r270
  text "A" at 74.45,27.3 h0.8 r270